# EAGLE board Reed_Switch_Board (EAGLE 9.4.2)
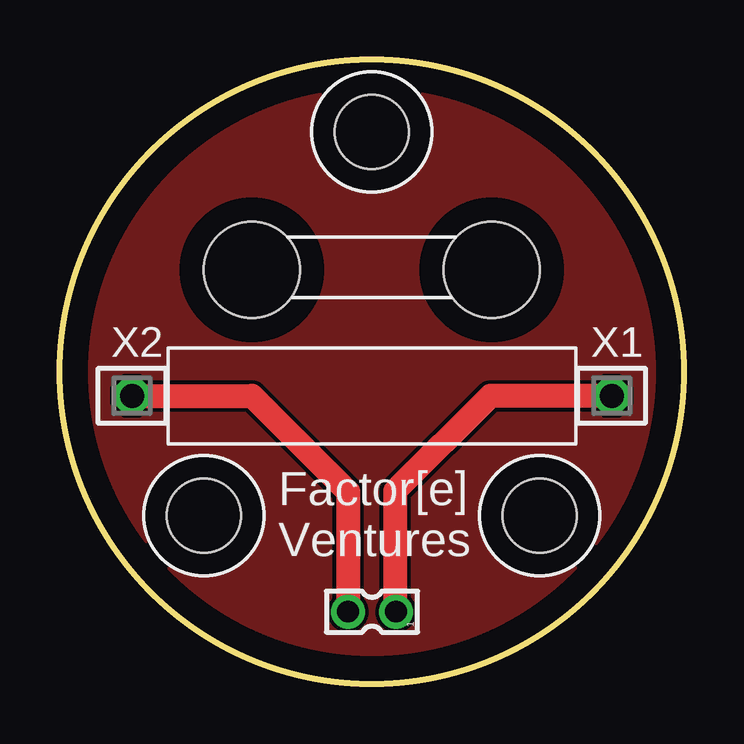
[diagram p0: board, top side]
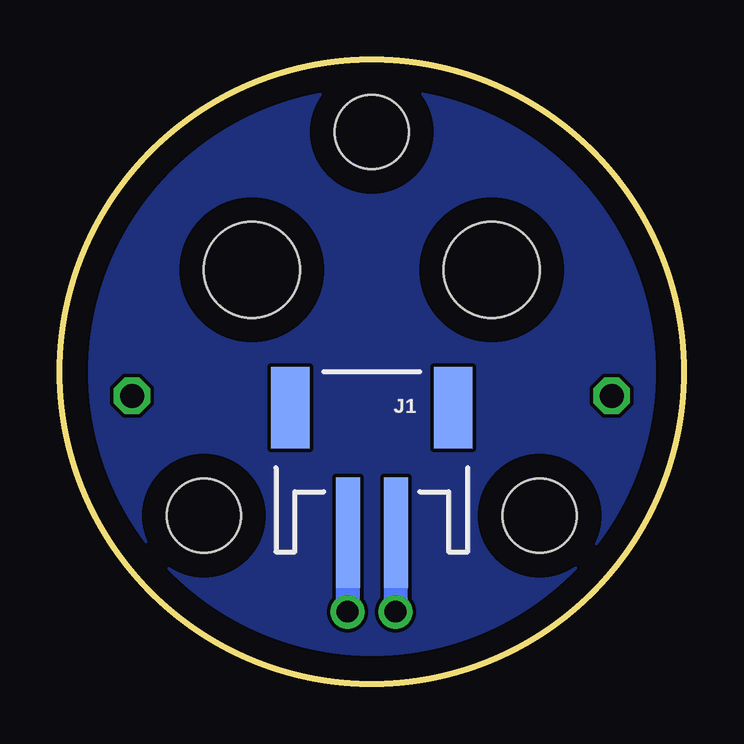
[diagram p1: board, bottom side, seen from below]

Size 26 x 26 mm. Coordinates in mm from the lower left corner, seen from the top.
Outline: circle at 13,13 radius 13
Copper layers (1*16): Top 0.035mm / dielectric 1.5mm / Bottom 0.035mm
Design rules "default": minimum track width 6mil, minimum drill 0.35mm, track to track 6mil, track to pad 6mil, pad to pad 6mil, via to via 6mil, smd to smd 6mil, copper to edge 40mil, drill to drill 6mil, minimum pad ring 10mil, minimum via ring 8mil, stop-mask expansion 4mil, vias tented up to drill 0mil, thermal gap 10mil
Holes 3.1 mm at 13,23 20,7 6,7
Holes 4 mm at 18,17.25 8,17.25

## Footprints (pad centres in the part's own frame; a part is rotated, then mirrored left to right if it is on the bottom)
JST-2-SMD = smd 1 x 4.6: 1 -1,-3.7; 2 1,-3.7 | smd 1.6 x 3.4: NC1 -3.4,1.5; NC2 3.4,1.5
SSW-101-02-G-S = drill 1 pad 1.5 octagon: 1 0,0
332-02 = drill 0.9 pad 1.27: 1 0,-1; 2 0,1

## Placement (x,y rotation side)
J1  JST  [JST-2-SMD]  13,10 0 bottom
X1  SSW-101-02-G-S  [SSW-101-02-G-S]  23,12 0 top
X2  SSW-101-02-G-S  [SSW-101-02-G-S]  3,12 0 top
X5  332-02  [332-02]  13.01,2.99 90 top

## Library data of the parts
J1 = SparkFun-Connectors; PROD_ID: CONN-11443
X1 X2 = con-samtec; MF: Samtec Inc.; MPN: SSW-101-02-G-S; OC_FARNELL: unknown; OC_NEWARK: 11P9336
X5 = con-garry

## Nets
REED+: J1.2 X2.1 X5.2
REED-: J1.1 X1.1 X5.1

## Tracks (layer width: path | path; a pad name or v marks a point on that pad's centre or on a via)
GND
  pour Bottom: 0,13 0,17 9,26 17,26 26,17 26,13 26,9 17,0 8,0 0,8
  pour Top: 8,0 0,8 0,17 9,26 17,26 26,17 26,9 17,0
REED+
  Top 1: X5.2 12.01,8 8.01,12 X2.1
  Bottom 1: X5.2 12,3.01 J1.2
REED-
  Top 1: X5.1 13.97,3.04 13.97,8.02 17.95,12 X1.1
  Bottom 1: X5.1 14,3.01 J1.1

## Text on the board
tPlace: Factor[e] / Ventures